# Altium PCB PCB1.PcbDoc
Units mm, origin at the board's own origin, x right, y up, seen from the top; angles counter-clockwise.
Board outline 246.63 x 182.12 mm, 2 copper layers (Top Layer, Bottom Layer); 43 components, 27 nets, 107 pads, 2 vias.
Unrouted connection lines stored in the file: 3.
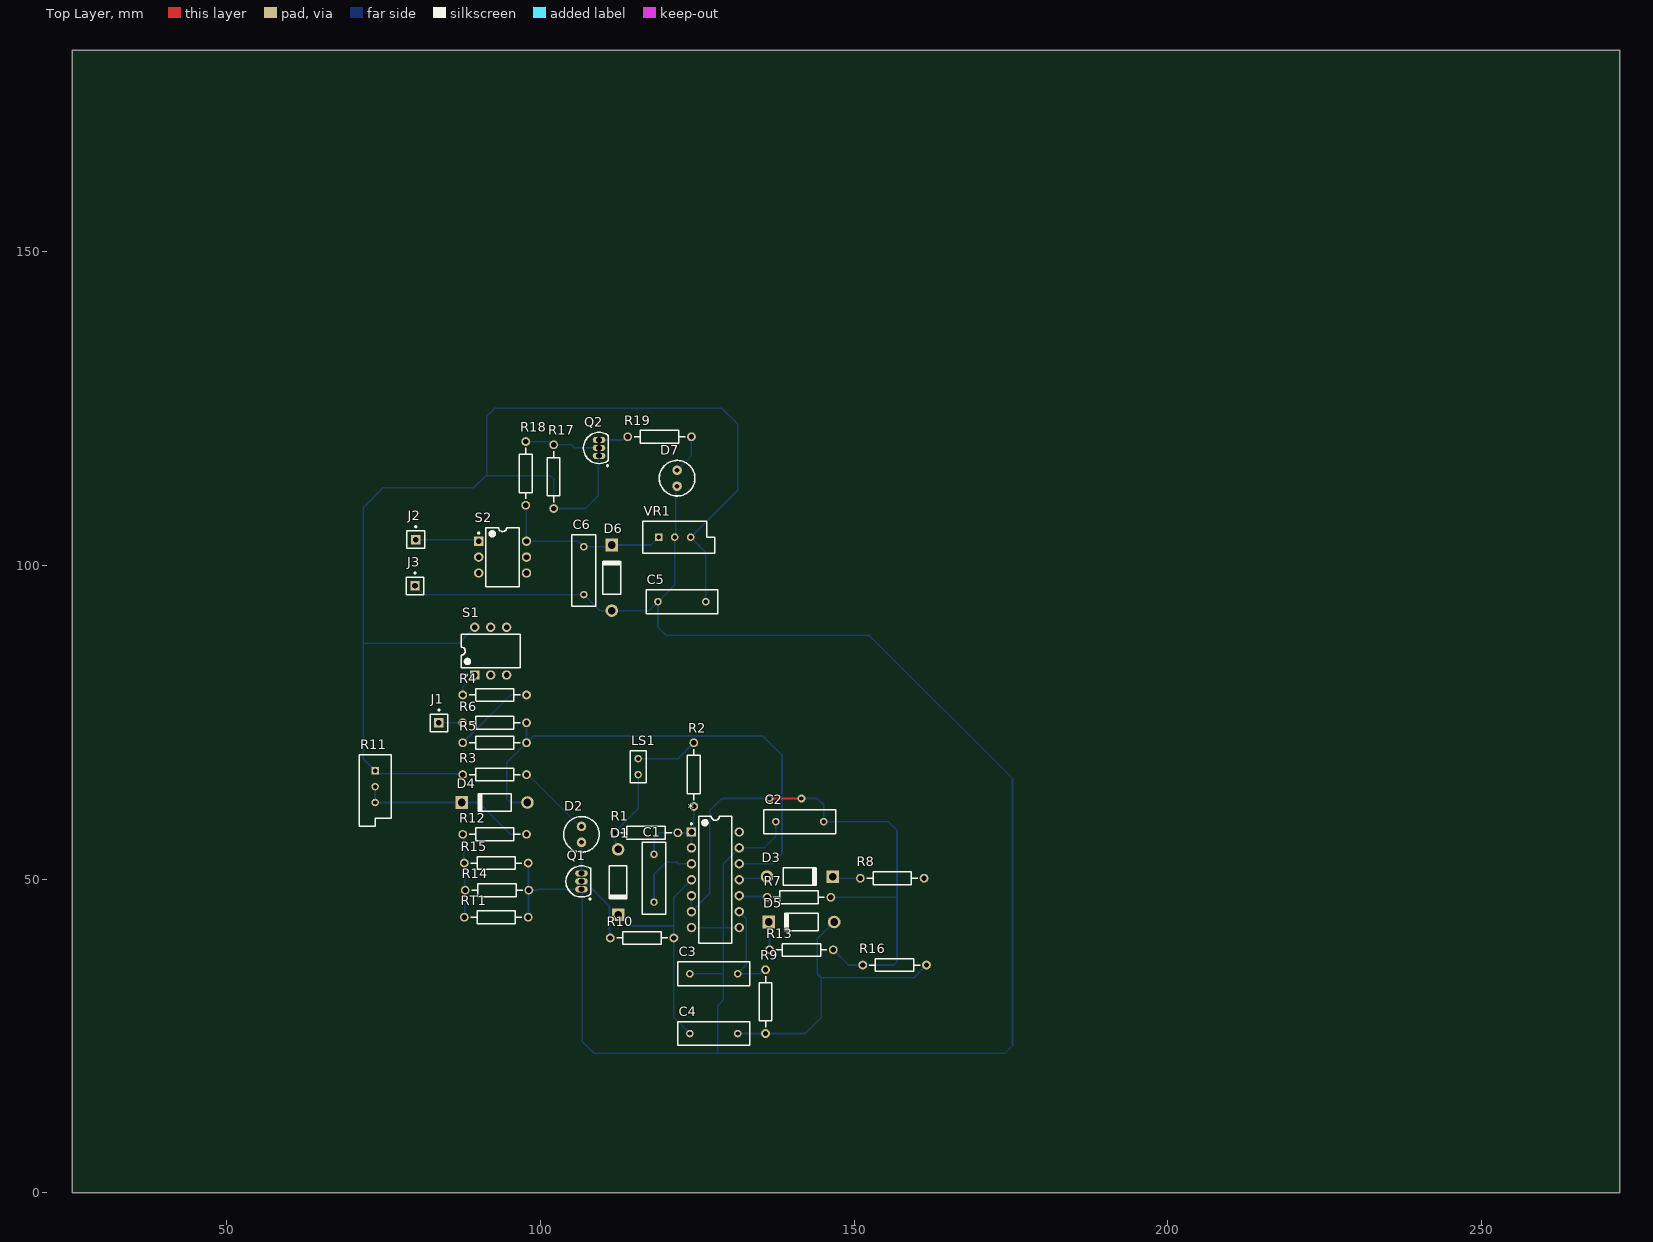
[diagram p0: Top Layer view]
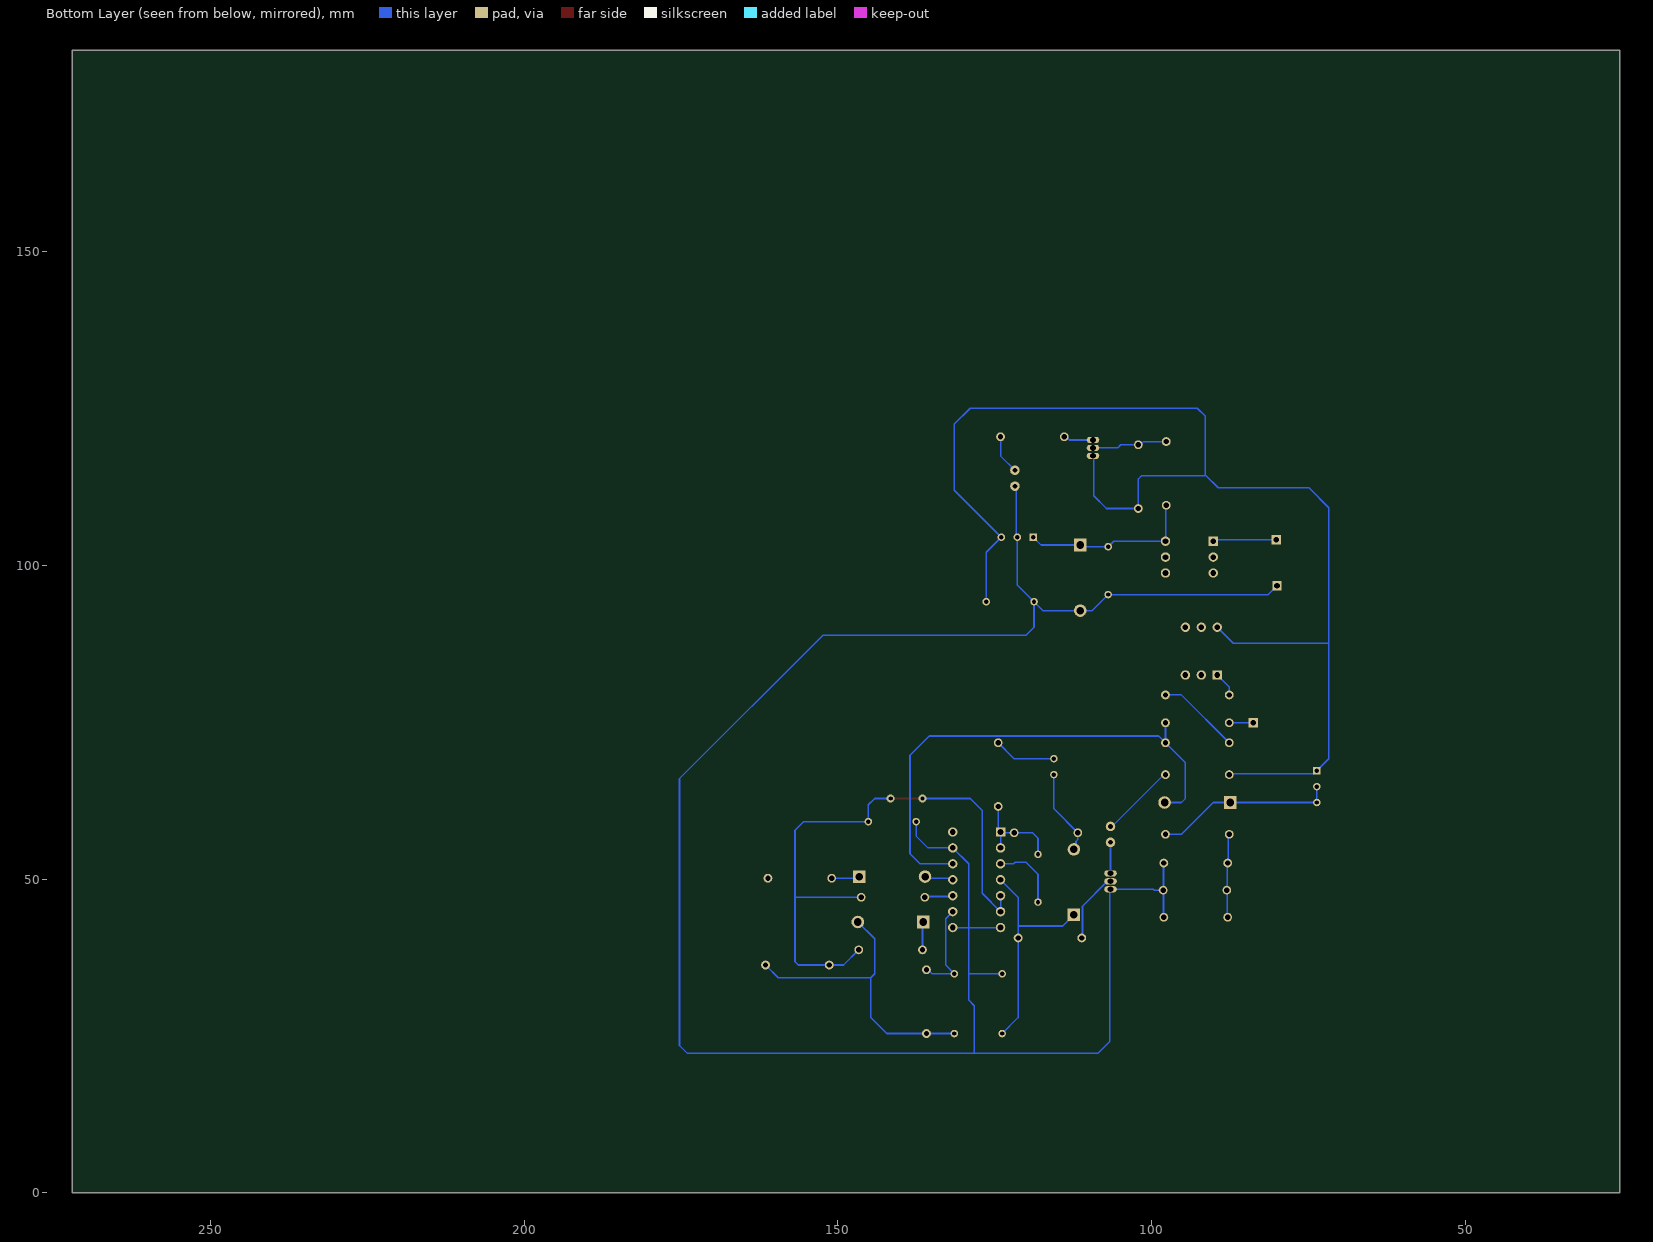
[diagram p1: Bottom Layer view, seen from below]

## Layer stack, top to bottom
Top Solder: solder mask 0.0102, Solder Resist, Dk 3.5
Top Layer: signal copper 0.0356
Dielectric 1: dielectric 0.32, FR-4, Dk 4.8
Bottom Layer: signal copper 0.0356
Bottom Solder: solder mask 0.0102, Solder Resist, Dk 3.5

## Board outline
25.4,0 272.034,0 272.034,182.118 25.4,182.118

## Design rules (kind name [scope] priority, off if disabled: settings)
Clearance [All] p1: gap=0.254 ignorepadtopadclearanceinfootprint=FALSE except(0: Arc-Hole Track-Hole SMDPad-Hole THPad-Hole Via-Hole Fill-Hole Poly-Hole Region-Hole Text-Hole)
PolygonConnect [All] p1: connectstyle=Relief reliefconductorwidth=0.254 reliefentries=4 polygonreliefangle="90 Angle" airgapwidth=0.254
RoutingVias [All] p1: holewidth=0.711 width=1.27 viastyle="Through Hole" minholewidth=0.711 minwidth=1.27 maxholewidth=0.711 maxwidth=1.27
SolderMaskExpansion [All] p1: expansion=0.102
Width [All] p1: maxlimit=0.254 minlimit=0.254 preferedwidth=0.254
30 further rules are at their usual default settings.

## Components (designator, comment, footprint, x,y, rotation, side; value= is the part's Value field where it differs from the comment)
* "Component_1" DIP-14 127.889,49.911 r0 top
C1 "Cap" RAD-0.3 118.11,50.165 r270 top value=100pF
C2 "Cap" RAD-0.3 141.351,59.182 r0 top value=100pF
C3 "Cap" RAD-0.3 127.635,34.925 r0 top value=100pF
C4 "Cap" RAD-0.3 127.635,25.4 r180 top value=100pF
C5 "Cap" RAD-0.3 122.555,94.234 r0 top value=100pF
C6 "Cap" RAD-0.3 106.934,99.187 r90 top value=100pF
D1 "Diode 1N4001" DO-41 112.395,49.53 r270 top
D2 "LED0" PCBComponent_1 106.553,58.42 r270 top
D3 "Diode 1N4934" DO-41 141.351,50.419 r0 top
D4 "Diode" DO-41 92.71,62.23 r180 top
D5 "Diode 1N4001" DO-41 141.605,43.18 r180 top
D6 "Diode 1N4001" DO-41 111.379,98.044 r90 top
D7 "LED0" PCBComponent_1 121.793,115.189 r270 top
J1 "Socket" PIN1 83.82,74.93 r0 top
J2 "Socket" PIN1 80.137,104.14 r0 top
J3 "Socket" PIN1 80.01,96.774 r0 top
LS1 "Buzzer" RAD-0.1 115.57,67.945 r90 top
Q1 "2N3904" TO-92A 106.553,49.657 r0 top
Q2 "2N3906" TO-92A 109.347,118.745 r0 top
R1 "Res3" AXIAL-0.4 116.84,57.404 r180 top value=1K
R2 "Res3" AXIAL-0.4 124.46,66.675 r90 top value=68K
R3 "Res3" AXIAL-0.4 92.71,66.675 r180 top value=120R
R4 "Res1" AXIAL-0.4 92.71,79.375 r0 top value=20MEG
R5 "Res1" AXIAL-0.4 92.71,71.755 r180 top value=10MEG
R6 "Res1" AXIAL-0.4 92.71,74.93 r0 top value=1MEG
R7 "Res3" AXIAL-0.4 141.224,47.117 r0 top value=68K
R8 "Res3" AXIAL-0.4 156.083,50.165 r0 top value=68K
R9 "Res3" AXIAL-0.4 135.89,30.48 r90 top value=1.5K
R10 "Res3" AXIAL-0.4 116.205,40.64 r180 top value=10K
R11 "RPot" VR5 73.66,64.77 r270 top value=100K
R12 "Res1" AXIAL-0.4 92.71,57.15 r0 top value=47K
R13 "Res3" AXIAL-0.4 141.605,38.735 r0 top value=200K
R14 "Res1" AXIAL-0.4 93.091,48.26 r0 top value=56K
R15 "Res1" AXIAL-0.4 92.964,52.578 r180 top value=6.8K
R16 "Res3" AXIAL-0.4 156.464,36.322 r180 top value=2.4MEG
R17 "Res1" AXIAL-0.4 102.108,114.173 r270 top value=47K
R18 "Res1" AXIAL-0.4 97.663,114.681 r90 top value=24K
R19 "Res3" AXIAL-0.4 118.999,120.523 r180 top value=1K
RT1 "3.3K" AXIAL-0.4 92.964,43.942 r180 top
S1 "SW DIP-3" DIP-6 92.075,86.36 r90 top
S2 "SW DIP-3" DIP-6 93.98,101.346 r0 top
VR1 "Volt Reg" VR5 121.412,104.521 r0 top

## Footprints (in the part's own frame and the unit in brackets; to place one, negate y for a bottom-side part, rotate by r counter-clockwise, add the part's x,y. Pads: shape width x height; smd on the part's side, far side on the other; paste and mask are expansions set on the pad)
AXIAL-0.4 [mm] "Axial Device, Thru-Hole; 2 Leads; 0.4 in Pin Spacing"
  round 1.4 hole 0.85: 1(-5.08,0) 2(5.08,0)
  silkscreen extent -4.06,-1.02 4.06,1.02
DIP-6 [mm] "DIP; 6 Leads; Row Spacing 7.62 mm; Pitch 2.54 mm"
  rect 1.5x1.5 hole 0.9: 1(-3.81,2.54)
  round 1.5 hole 0.9: 2(-3.81,0) 3(-3.81,-2.54) 4(3.81,-2.54) 5(3.81,0) 6(3.81,2.54)
  silkscreen extent -3.93,-4.7 2.65,4.7, body extent -3.55,-4.7 3.55,4.7, height 5.46
DIP-14 [mm] "DIP; 14 Leads; Row Spacing 7.62 mm; Pitch 2.54 mm"
  rect 1.5x1.5 hole 0.9: 1(-3.81,7.62)
  round 1.5 hole 0.9: 2(-3.81,5.08) 3(-3.81,2.54) 4(-3.81,0) 5(-3.81,-2.54) 6(-3.81,-5.08) 7(-3.81,-7.62) 8(3.81,-7.62) 9(3.81,-5.08) 10(3.81,-2.54) 11(3.81,0) 12(3.81,2.54) 13(3.81,5.08) 14(3.81,7.62)
  silkscreen extent -3.93,-10.1 2.65,10.1, body extent -3.6,-10.1 3.6,10.1, height 5.08
DO-41 [mm] "Diode, Axial; Body 5.2 x 2.7 mm (LxDia. max), Lead Dia. 0.86 mm (max)"
  round 2 hole 1.2: 1(-5.23,0)
  rect 2x2 hole 1.2: 2(5.23,0)
  silkscreen extent -2.65,-1.4 2.75,1.4
PCBComponent_1 [mil]
  round 60 hole 30: 1(0,0) 2(100,0)
  silkscreen extent -62,-112 162,112
PIN1 [mm] "Connector; Plug"
  rect 1.5x1.5 hole 0.9: 1(0,0)
  silkscreen extent -1.4,-1.4 1.4,2.17
RAD-0.1 [mm] "Radial Cap, Thru-Hole; 2 Leads; 0.1 in Pin Spacing"
  round 1.2 hole 0.7: 1(-1.27,0) 2(1.27,0)
  silkscreen extent -2.54,-1.27 2.54,1.27
RAD-0.3 [mm] "Radial Cap, Thru-Hole; 2 Leads; 0.3 in Pin Spacing"
  round 1.2 hole 0.7: 1(-3.81,0) 2(3.81,0)
  silkscreen extent -5.71,-1.91 5.71,1.91
TO-92A [mm] "TO, Flat Index; 3 In-Line, Axial Leads; Body Dia. 4.5mm; Leads 0.51 x 0.48 mm (max)"
  oval 2x1 hole 0.9: 1(0,-1.27) 2(0,0) 3(0,1.27)
  silkscreen extent -2.48,-2.95 1.5,2.48, body extent -2.48,-2.5 1.5,2.5, height 6.86
VR5 [mm] "Thru-Hole; 3 Leads"
  rect 1.2x1.2 hole 0.7: 1(-2.54,0)
  round 1.2 hole 0.7: 2(0,0) 3(2.54,0)
  silkscreen extent -5.08,-2.54 6.35,2.54

## Part data
C1 C2 C3 C4 C5 C6: "Capacitor", LatestRevisionDate=17-Jul-2002, LatestRevisionNote="Re-released for DXP Platform.", PackageDescription="Radial Cap, Thru-Hole; 2 Leads; 0.3 in Pin Spacing", PackageReference=RAD-0.3, Published=8-Jun-2000, Publisher="Altium Limited"
D1 D5 D6: "1 Amp General Purpose Rectifier", Code_JEDEC=DO-204-AL, ComponentLink1Description="Manufacturer Link", ComponentLink1URL=http://www.fairchildsemi.com/, ComponentLink2Description=Datasheet, ComponentLink2URL=http://www.fairchildsemi.com/ds/1N%2F1N4001.pdf, DatasheetVersion=1998, LatestRevisionDate=17-Jul-2002, LatestRevisionNote="Re-released for DXP Platform.", PackageDescription="Diode, Axial; Body 5.2 x 2.7 mm (LxDia. max), Lead Dia. 0.86 mm (max)", PackageReference=DO-41, PackageVersion=Aug-1999, Published=8-Jun-2000, Publisher="Altium Limited"
D2 D7: "Typical INFRARED GaAs LED", LatestRevisionDate=08-Jul-2005, LatestRevisionNote="Mech Layer 1 removed.", PackageDescription="LED; 2 Leads", PackageReference=LED-0, Published=8-Jun-2000, Publisher="Altium Limited"
D3: "1 Amp Fast Recovery Rectifier", Code_JEDEC=DO-204-AL, ComponentLink1Description="Manufacturer Link", ComponentLink1URL=http://www.fairchildsemi.com/, ComponentLink2Description=Datasheet, ComponentLink2URL=http://www.fairchildsemi.com/ds/1N%2F1N4934.pdf, DatasheetVersion=1999, LatestRevisionDate=17-Jul-2002, LatestRevisionNote="Re-released for DXP Platform.", PackageDescription="Diode, Axial; Body 5.2 x 2.7 mm (LxDia. max), Lead Dia. 0.86 mm (max)", PackageReference=DO-41, PackageVersion=Aug-1999, Published=8-Jun-2000, Publisher="Altium Limited"
D4: "Default Diode", Code_JEDEC=DO-214-AB, LatestRevisionDate=17-Jul-2002, LatestRevisionNote="Re-released for DXP Platform.", PackageDescription="DO-214-AB/SMC; 2 C-Bend Leads; Body 7.9 x 5.9 mm, inc. leads (LxW)", PackageReference=SMC, PackageVersion=Sep-1996, Published=8-Jun-2000, Publisher="Altium Limited"
LS1: "Magnetic Transducer Buzzer", ComponentLink1Description="Manufacturer Link", ComponentLink1URL=http://www.megastar.com/linecard/buzzmode/index.php, DatasheetVersion=17-Dec-2003, LatestRevisionDate=17-Dec-2003, LatestRevisionNote="Schematic revised, PCB Footprint replaced.", PackageDescription="Magnetic Transducer Buzzer", PackageReference=ABSM-1574, Published=24-Mar-1999, Publisher="Altium Limited"
Q1: "NPN General Purpose Amplifier", ComponentLink1Description="Manufacturer Link", ComponentLink1URL=http://www.fairchildsemi.com/, ComponentLink2Description=Datasheet, ComponentLink2URL=http://www.fairchildsemi.com/ds/2N%2F2N3904.pdf, DatasheetVersion=1997, LatestRevisionDate=15-Jan-2003, LatestRevisionNote="PCB Footprint 'BCY-W3/D4.7' replaced", PackageDescription="TO, Flat Index; 3 In-Line, Axial Leads; Body Dia. 4.5mm; Leads 0.51 x 0.48 mm (max)", PackageReference=TO-92A, PackageVersion=Sep-1998, Published=8-Jun-2000, Publisher="Altium Limited"
Q2: "PNP General Purpose Amplifier", ComponentLink1Description="Manufacturer Link", ComponentLink1URL=http://www.fairchildsemi.com/, ComponentLink2Description=Datasheet, ComponentLink2URL=http://www.fairchildsemi.com/ds/2N%2F2N3906.pdf, DatasheetVersion=1997, LatestRevisionDate=15-Jan-2003, LatestRevisionNote="PCB Footprint 'BCY-W3/D4.7' replaced", PackageDescription="TO, Flat Index; 3 In-Line, Axial Leads; Body Dia. 4.5mm; Leads 0.51 x 0.48 mm (max)", PackageReference=TO-92A, PackageVersion=Sep-1998, Published=8-Jun-2000, Publisher="Altium Limited"
R1 R2 R3 R4 R5 R6 R7 R8 R9 R10 R12 R13 R14 R15 R16 R17 R18 R19: "Resistor", Published=8-Jun-2000, Publisher="Altium Limited"
  R1 R2 R3 R7 R8 R9 R10 R13 R16 R19: LatestRevisionDate=29-May-2009, LatestRevisionNote="IPC-7351 Footprint Added.", PackageDescription="Chip Resistor", PackageReference=J1-0603
  R4 R5 R6 R12 R14 R15 R17 R18: LatestRevisionDate=17-Jul-2002, LatestRevisionNote="Re-released for DXP Platform.", PackageDescription="Axial Device, Thru-Hole; 2 Leads; 0.3 in Pin Spacing", PackageReference=AXIAL-0.3
R11: "Potentiometer", LatestRevisionDate=17-Jul-2002, LatestRevisionNote="Re-released for DXP Platform.", PackageDescription="Variable Resistor, Thru-Hole; 3 Leads", PackageReference=VR5, Published=8-Jun-2000, Publisher="Altium Limited", Set Position=0.5, Sim Note="Enter the Resistance value and the set point into parameter fields."
RT1: library part "Res Thermal", "Thermistor", Code_IPC=RESC2012, LatestRevisionDate=29-May-2009, LatestRevisionNote="IPC-7351 Footprint Added.", PackageDescription="Chip Resistor 0805 Case Size", PackageReference=6-0805, PackageVersion=Mar-2003, Published=24-Mar-1999, Publisher="Altium Limited"
S1 S2: "DIP Switch, 3 Position, SPST", Code_JEDEC=MO-001-AM, LatestRevisionDate=17-Jul-2002, LatestRevisionNote="Re-released for DXP Platform.", PackageReference=DIP-6, Published=24-Mar-1999, Publisher="Altium Limited"
VR1: "Voltage Regulator", LatestRevisionDate=29-May-2009, LatestRevisionNote="IPC-7351 Footprint Added.", PackageDescription="3-Pin Transistor Outline Package 2.54 mm Pitch, 15.1 mm Lead Span", PackageReference=D2PAK, Published=24-Mar-1999, Publisher="Altium Limited"
J1 J2 J3: LatestRevisionDate=17-Jul-2002, LatestRevisionNote="Re-released for DXP Platform.", Publisher="Altium Limited"

## Via types
v1: diameter 1.27, hole 0.711, Top Layer to Bottom Layer, 2 vias

## Nets (pads, with @x,y where several pads share a name; then routed paths per layer and width w, separated by ;. In a path a pad name is that pad's centre, name@x,y a point inside that pad or via, vN(x,y) a via of type N, cw(c..) or ccw(c..) an arc to the next point about the centre after c; other vN are vias at no path point)
+5V: *.14 C5.2 Q2.1 R3.2 R11.1 R17.2 S1.6 VR1.3 | length 211
  Bottom Layer w0.254: R3.2 87.468,66.837 74.133,66.837 R11.1 71.755,69.215 71.755,87.63 ; S1.6 86.995,87.63 71.755,87.63 ; Q2.1 109.22,117.348 109.22,111.125 107.188,109.093 R17.2 102.108,113.792 101.6,114.3 91.589,114.3 91.44,114.449 ; C5.2 126.365,102.108 VR1.3 131.445,112.014 131.445,122.555 128.905,125.095 92.71,125.095 91.44,123.825 91.44,114.449 ; 71.755,87.63 71.755,109.22 74.93,112.395 89.386,112.395 91.44,114.449
GND: *.7 *.8 *.13 C2.1 C3.1 C5.1 C6.1 D6.1 D7.2 J3.1 Q1.1 R14.2 R15.1 RT1.1 VR1.2 | length 341.2
  Bottom Layer w0.254: J3.1 81.407,95.377 C6.1 109.497,92.814 D6.1 117.325,92.814 C5.1 ; RT1.1 98.108,44.005 98.108,48.197 R14.2 ; R15.1 98.108,52.514 98.108,48.323 R14.2 ; D7.2 121.593,112.449 121.593,104.702 VR1.2 121.412,96.901 C5.1 ; C3.1 129.159,34.925 ; *.7 129.159,42.291 ; *.8 129.159,42.291 ; C2.1 137.541,56.896 135.636,54.991 *.13 129.159,52.451 129.159,42.291 ; R14.2 99.568,48.26 99.695,48.387 Q1.1 106.68,48.26 106.68,24.13 108.585,22.225 128.27,22.225 ; C5.1 118.745,90.17 120.015,88.9 152.4,88.9 175.26,66.04 175.26,23.495 173.99,22.225 128.27,22.225 ; 128.27,22.225 128.27,29.845 129.159,30.734 129.159,34.925 ; 129.159,34.925 129.159,42.291
IN: J1.1 R6.1 | length 3.8
  Bottom Layer w0.254: J1.1 R6.1
Net*_1: *.1 *.2 C1.1 R1.1 R2.1 | length 15.9
  Bottom Layer w0.254: C1.1@117.854,53.975 C1.1 118.11,56.515 118.999,57.404 R1.1 123.952,57.404 *.1 ; *.2 *.1 ; R2.1 124.46,57.912 *.1
Net*_3: *.3 C1.2 LS1.2 R2.2 | length 21.3
  Bottom Layer w0.254: LS1.2 121.92,69.215 R2.2 ; C1.2 118.11,50.8 120.015,52.705 121.751,52.705 122.005,52.451 *.3
Net*_4: *.4 C4.2 D1.2 R10.1 | length 36.3
  Bottom Layer w0.254: D1.2 114.15,42.545 121.285,42.545 ; C4.2 121.285,27.94 R10.1 121.285,42.545 ; *.4 121.285,47.117 121.285,42.545
Net*_5: *.5 *.6 C2.2 R7.2 R13.2 R16.2 | length 97
  Top Layer w0.254: v1(136.525,62.865) v1(141.605,62.865)
  Bottom Layer w0.254: *.5 *.6 127,47.752 127,60.96 128.905,62.865 v1(136.525,62.865) ; v1(141.605,62.865) 144.145,62.865 145.161,61.849 C2.2 155.448,59.182 156.845,57.785 156.845,47.117 ; R7.2 156.845,47.117 ; R13.2 149.098,36.322 156.337,36.322 156.845,36.83 156.845,47.117
Net*_9: *.9 C3.2 R9.2 | length 15.7
  Bottom Layer w0.254: *.9 132.83,43.7 132.83,36.31 C3.2 134.996,34.925 135.631,35.56 R9.2
Net*_10: *.10 R7.1 | length 4.6
  Bottom Layer w0.254: *.10 131.826,47.244 136.017,47.244 R7.1
Net*_11: *.11 D3.1 | length 4.6
  Bottom Layer w0.254: *.11 131.937,50.149 135.851,50.149 D3.1
Net*_12: *.12 D4.1 R5.1 R6.2 | length 82.6
  Bottom Layer w0.254: R6.2 R5.1 ; D4.1 95.25,62.23 94.615,62.865 94.615,68.58 R5.1 ; *.12 136.906,52.451 138.522,54.067 138.522,69.758 135.444,72.836 98.871,72.836 R5.1
NetC4_1: C4.1 D5.1 R8.2 R9.1 R16.1 | length 48.8
  Bottom Layer w0.254: C4.1 R9.1 142.24,25.4 144.78,27.94 144.78,34.29 ; D5.1 144.145,40.49 144.145,34.925 144.78,34.29 ; R8.2 R8.2@161.29,50.038 ; R16.1 159.512,34.29 144.78,34.29
NetC6_2: C6.2 D6.2 R18.1 S2.6 VR1.1 | length 27.8
  Bottom Layer w0.254: R18.1 97.727,109.537 97.727,103.95 S2.6 106.045,103.886 C6.2 111.102,102.997 D6.2 117.625,103.274 VR1.1
NetD1_1: D1.1 LS1.1 R1.2 | length 14.7
  Bottom Layer w0.254: D1.1@112.867,55.232 112.395,55.232 D1.1 112.061,55.094 112.061,56.022 111.76,56.323 R1.2 115.57,61.214 LS1.1
NetD2_1: D2.1 R3.1 | length 12.2
  Bottom Layer w0.254: R3.1 98.044,66.675 106.299,58.42 D2.1
NetD2_2: D2.2 Q1.3 | length 5
  Bottom Layer w0.254: Q1.3 D2.2
NetD3_2: D3.2 R8.1 | length 4.5
  Bottom Layer w0.254: D3.2 146.835,50.165 R8.1
NetD4_2: D4.2 R11.2 R11.3 R12.2 | length 28.8
  Bottom Layer w0.254: R11.2 R11.3 D4.2 90.17,62.23 95.25,57.15 R12.2
NetD5_2: D5.2 R13.1 | length 4.5
  Bottom Layer w0.254: D5.2 136.525,43.03 R13.1
NetD7_1: D7.1 R19.1 | length 6.3
  Bottom Layer w0.254: D7.1 124.079,117.475 R19.1
NetJ2_1: J2.1 S2.1 | length 10.1
  Bottom Layer w0.254: J2.1 89.916,104.14 S2.1
NetQ1_2: Q1.2 R10.2 | length 11.2
  Bottom Layer w0.254: Q1.2 107.053,49.657 111.014,45.696 111.014,40.751 R10.2
NetQ2_2: Q2.2 R17.1 R18.2 | length 12.1
  Bottom Layer w0.254: R18.2 101.29,119.761 101.798,119.253 R17.1 104.902,119.253 105.41,118.745 Q2.2
NetQ2_3: Q2.3 R19.2 | length 4.8
  Bottom Layer w0.254: Q2.3 113.101,120.015 113.609,120.523 R19.2
NetR4_1: R4.1 S1.1 | length 4
  Bottom Layer w0.254: R4.1 87.63,80.645 S1.1
NetR4_2: R4.2 R5.2 | length 13.3
  Bottom Layer w0.254: R5.2 95.25,79.375 R4.2
NetR12_1: R12.1 R14.1 R15.2 RT1.2 | length 13.4
  Bottom Layer w0.254: R12.1 87.757,57.023 87.757,52.705 R15.2 87.947,52.514 87.947,48.323 R14.1 87.947,48.197 87.947,44.005 RT1.2
pads on no net: S1.2 S1.3 S1.4 S1.5 S2.2 S2.3 S2.4 S2.5